# EAGLE board gate_boost_panel (EAGLE 9.3.0)
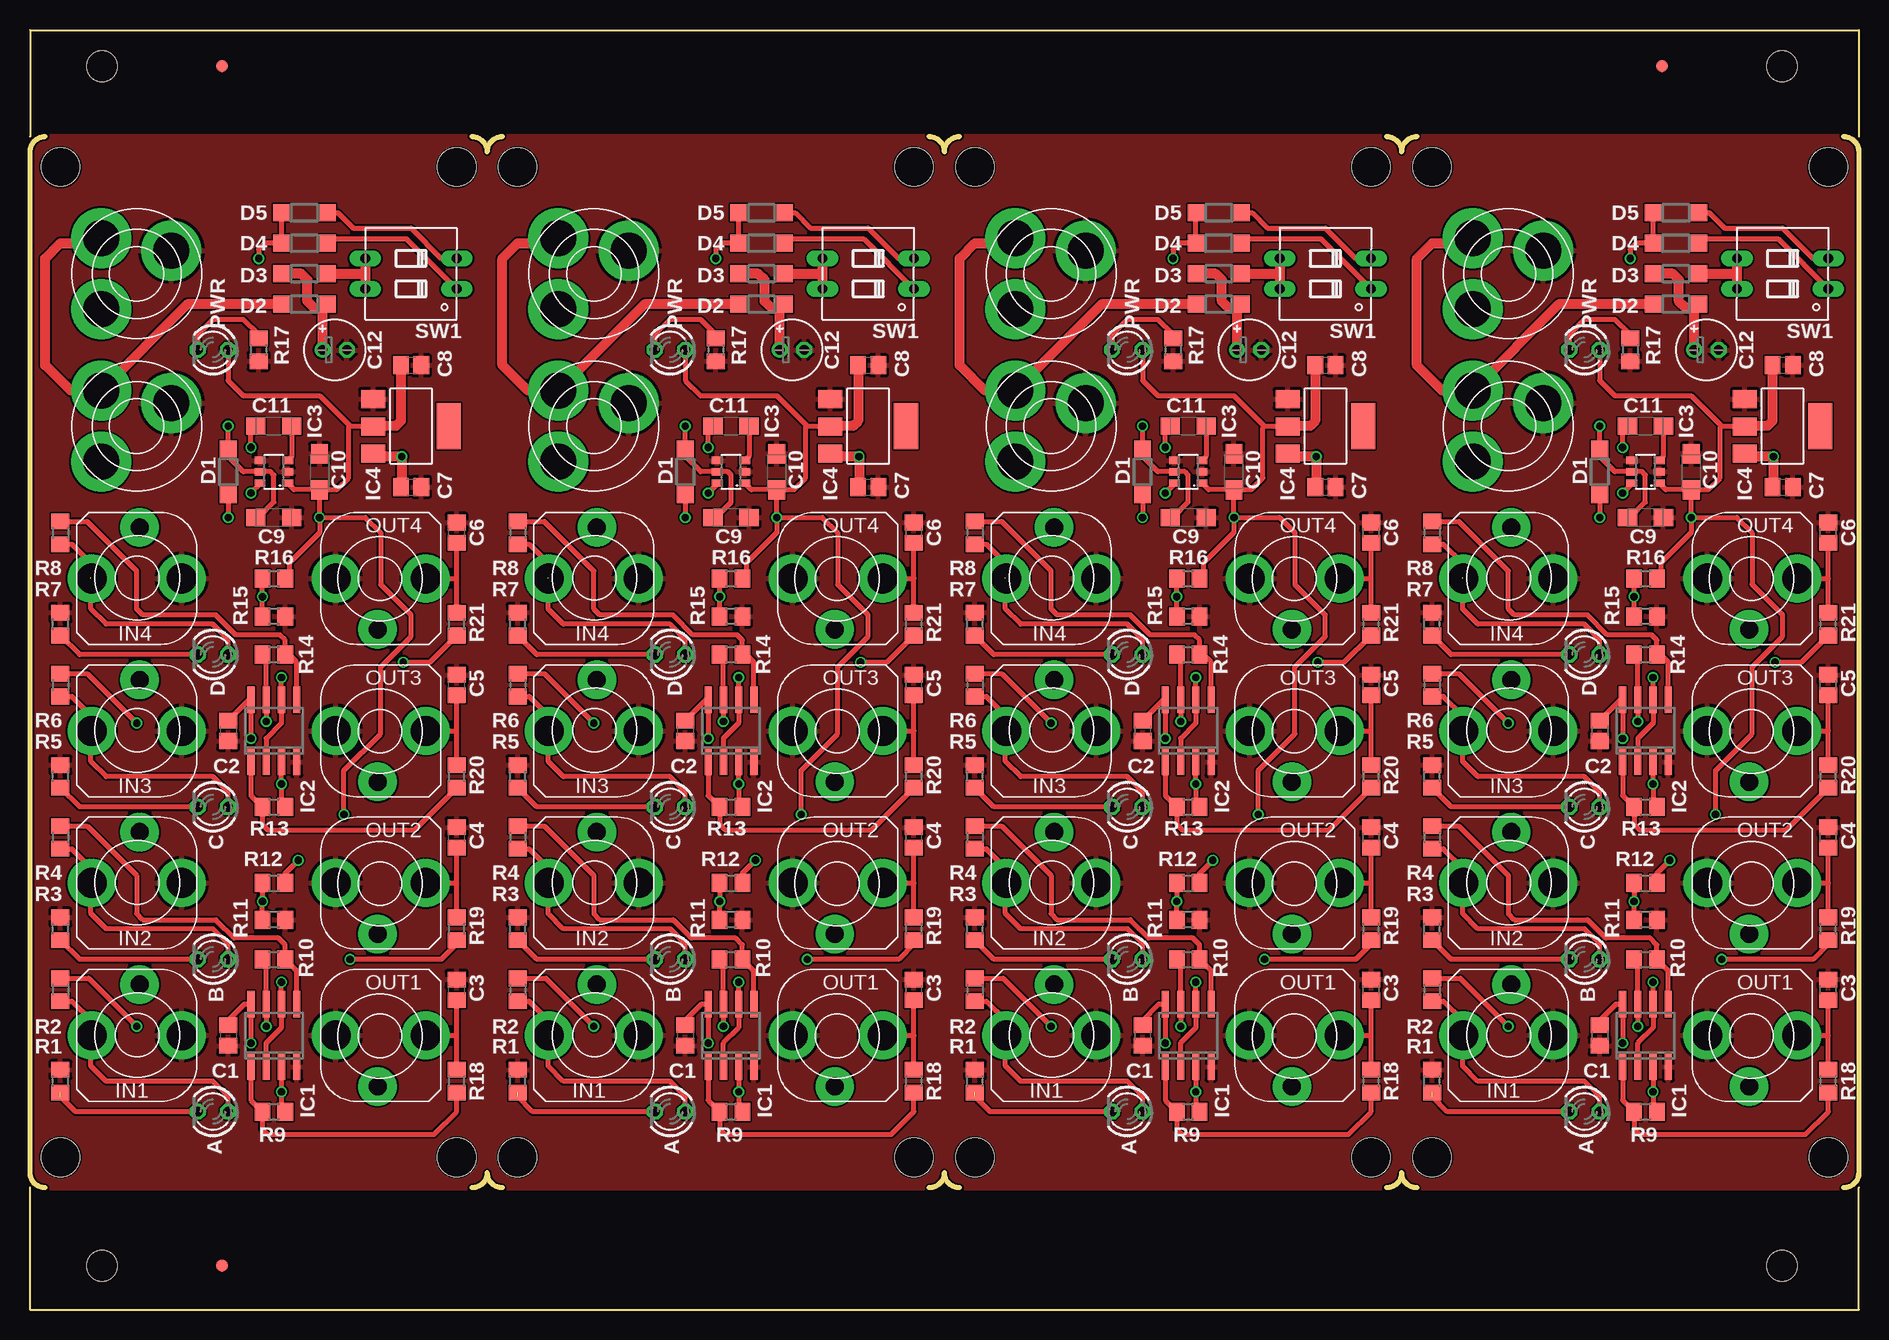
[diagram p0: board, top side]
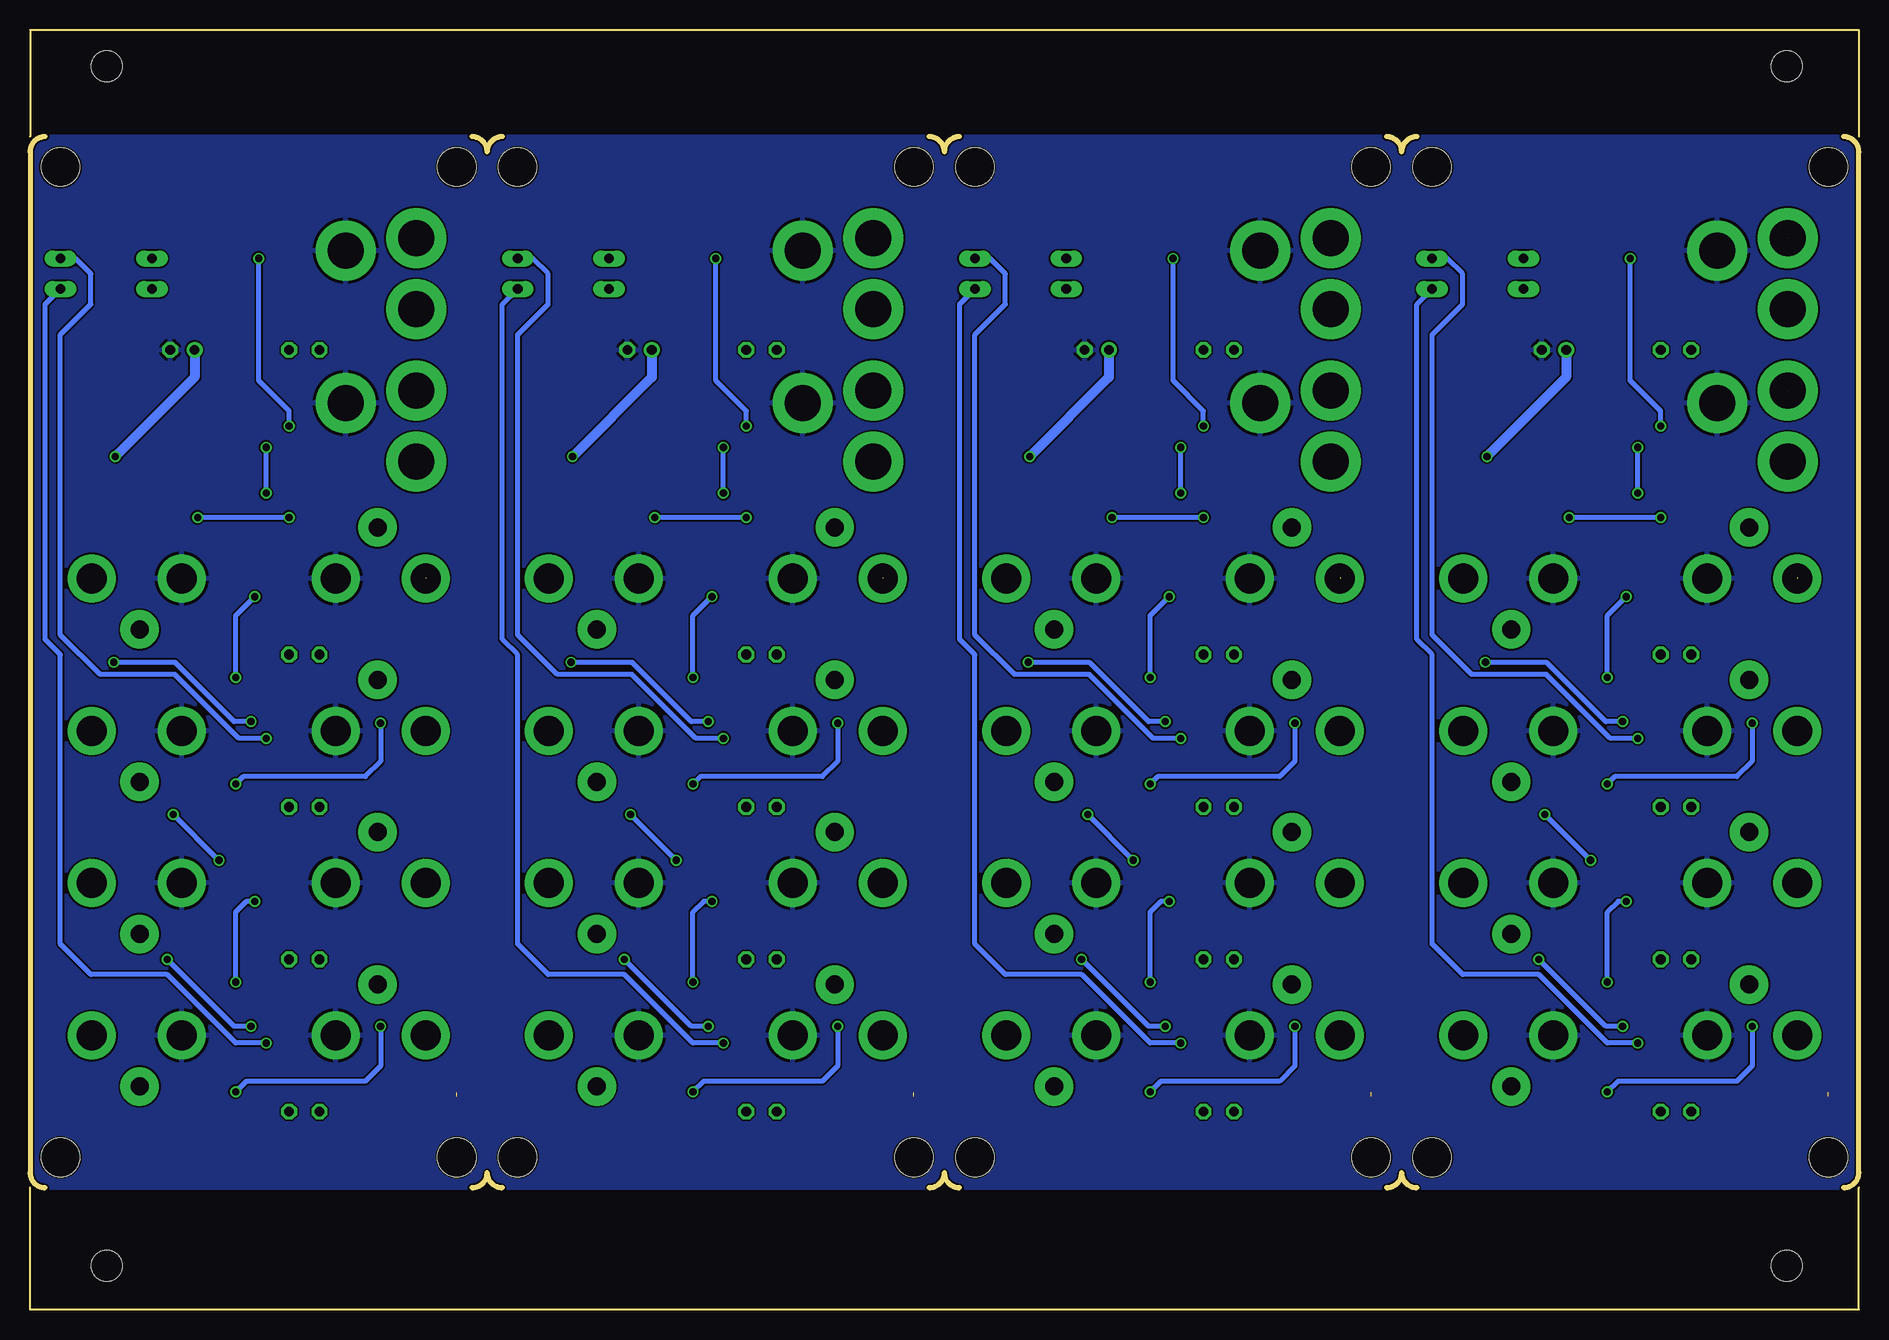
[diagram p1: board, bottom side, seen from below]

Size 152.4 x 106.68 mm. Coordinates in mm from the lower left corner, seen from the top.
Outline: 1.27,10.16 arc-90 0,11.43 0,96.52 arc-90 1.27,97.79
Outline: 36.83,97.79 arc-90 38.1,96.52 arc-90 39.37,97.79
Outline: 36.83,10.16 arc90 38.1,11.43 arc90 39.37,10.16
Outline: 74.93,97.79 arc-90 76.2,96.52 arc-90 77.47,97.79
Outline: 74.93,10.16 arc90 76.2,11.43 arc90 77.47,10.16
Outline: 113.03,97.79 arc-90 114.3,96.52 arc-90 115.57,97.79
Outline: 113.03,10.16 arc90 114.3,11.43 arc90 115.57,10.16
Outline: 151.13,97.79 arc-90 152.4,96.52 152.4,11.43 arc-90 151.13,10.16
Outline: 0,97.79 0,106.68 152.4,106.68 152.4,97.79
Outline: 0,10.16 0,0 152.4,0 152.4,10.16
Copper layers (1*16): Top 0.035mm / dielectric 1.5mm / Bottom 0.035mm
Design rules "hackvana": minimum track width 6mil, minimum drill 0.3mm, track to track 6mil, track to pad 9mil, pad to pad 6mil, via to via 6mil, smd to smd 0mil, copper to edge 6mil, drill to drill 6mil, minimum pad ring 10mil, minimum via ring 6mil, stop-mask expansion 2mil, vias tented up to drill 100mil, thermal gap 10mil
Holes 3.2 mm at 2.54,95.25 2.54,12.7 35.56,12.7 35.56,95.25 40.64,95.25 40.64,12.7 73.66,12.7 73.66,95.25 78.74,95.25 78.74,12.7 111.76,12.7 111.76,95.25 116.84,95.25 116.84,12.7 149.86,12.7 149.86,95.25
Holes 2.54 mm at 6,103.66 6,3.66 146,103.66 146,3.66

## Footprints (pad centres in the part's own frame; a part is rotated, then mirrored left to right if it is on the bottom)
LED3MM = drill 0.813 octagon: A -1.27,0; K 1.27,0
C0805 = smd 1.3 x 1.5: 1 -0.85,0; 2 0.85,0
SMC_A = smd 1.6 x 1.4: + -1.5,0; - 1.5,0
E2-5 = drill 0.813 pad 1.27: + -1.016,0 | drill 0.813 pad 1.27 octagon: - 1.016,0
SOD123 = smd 1.4 x 1.4: A 1.9,0; C -1.9,0
FIDUCIAL_1MM = smd 1 x 1: 1 0,0
SO08 = smd 0.6 x 2.2: 1 -1.905,-2.6; 2 -0.635,-2.6; 3 0.635,-2.6; 4 1.905,-2.6; 5 1.905,2.6; 6 0.635,2.6; 7 -0.635,2.6; 8 -1.905,2.6
SOT23-6 = smd 0.6 x 0.9: 1 -0.95,-1.15; 2 0,-1.15; 3 0.95,-1.15; 4 0.95,1.15; 5 0,1.15; 6 -0.95,1.15
SOT223 = smd 1.499 x 2.007: 1 -2.261,-3.15; 2 0.025,-3.15; 3 2.311,-3.15 | smd 3.81 x 2.007: 4 0,3.15
VERTICAL_3_5MM_SOCKET = drill 2.5 pad 4: 2 0,-3.75; 4 0,3.75 | drill 1.5 pad 3.2: 3 4.25,-0.25
R0805 = smd 1.3 x 1.5: 1 -0.95,0; 2 0.95,0
DIP02YL = drill 0.813 long: 1 -1.27,-3.81; 2 1.27,-3.81; 3 1.27,3.81; 4 -1.27,3.81
PWR_SOCKET_2_1MM = drill 3 pad 5: BARREL 0,4.2; NC -4.2,0; PIN 3.4,-0.7

## Placement (x,y rotation side)
A  [LED3MM]  15.24,16.51 180 top
A1  [LED3MM]  53.34,16.51 180 top
A2  [LED3MM]  91.44,16.51 180 top
A3  [LED3MM]  129.54,16.51 180 top
B  [LED3MM]  15.24,29.21 180 top
B1  [LED3MM]  53.34,29.21 180 top
B2  [LED3MM]  91.44,29.21 180 top
B3  [LED3MM]  129.54,29.21 180 top
C  [LED3MM]  15.24,41.91 180 top
C1  [C0805]  16.51,22.86 270 top
C2  [C0805]  16.51,48.26 270 top
C3  [C0805]  35.56,26.67 90 top
C4  [C0805]  35.56,39.37 90 top
C5  [C0805]  35.56,52.07 90 top
C6  [C0805]  35.56,64.77 90 top
C7  [C0805]  31.75,68.58 0 top
C8  [C0805]  31.75,78.74 0 top
C9  [SMC_A]  20.32,66.04 0 top
C10  10u  [SMC_A]  24.13,69.85 90 top
C11  10u  [SMC_A]  20.32,73.66 0 top
C12  [E2-5]  25.4,80.01 0 top
C13  [C0805]  73.66,26.67 90 top
C14  [C0805]  73.66,39.37 90 top
C15  10u  [SMC_A]  58.42,73.66 0 top
C16  [SMC_A]  58.42,66.04 0 top
C17  10u  [SMC_A]  62.23,69.85 90 top
C18  [C0805]  54.61,22.86 270 top
C19  [LED3MM]  53.34,41.91 180 top
C20  [C0805]  73.66,52.07 90 top
C21  [C0805]  73.66,64.77 90 top
C22  [C0805]  54.61,48.26 270 top
C23  [E2-5]  63.5,80.01 0 top
C24  [C0805]  69.85,68.58 0 top
C25  [C0805]  69.85,78.74 0 top
C26  [C0805]  111.76,26.67 90 top
C27  [C0805]  111.76,39.37 90 top
C28  10u  [SMC_A]  96.52,73.66 0 top
C29  [SMC_A]  96.52,66.04 0 top
C30  10u  [SMC_A]  100.33,69.85 90 top
C31  [C0805]  92.71,22.86 270 top
C32  [LED3MM]  91.44,41.91 180 top
C33  [C0805]  111.76,52.07 90 top
C34  [C0805]  111.76,64.77 90 top
C35  [C0805]  92.71,48.26 270 top
C36  [E2-5]  101.6,80.01 0 top
C37  [C0805]  107.95,68.58 0 top
C38  [C0805]  107.95,78.74 0 top
C39  [C0805]  149.86,26.67 90 top
C40  [C0805]  149.86,39.37 90 top
C41  10u  [SMC_A]  134.62,73.66 0 top
C42  [SMC_A]  134.62,66.04 0 top
C43  10u  [SMC_A]  138.43,69.85 90 top
C44  [C0805]  130.81,22.86 270 top
C45  [LED3MM]  129.54,41.91 180 top
C46  [C0805]  149.86,52.07 90 top
C47  [C0805]  149.86,64.77 90 top
C48  [C0805]  130.81,48.26 270 top
C49  [E2-5]  139.7,80.01 0 top
C50  [C0805]  146.05,68.58 0 top
C51  [C0805]  146.05,78.74 0 top
D  [LED3MM]  15.24,54.61 180 top
D1  MBR0520LT  [SOD123]  16.51,69.85 270 top
D2  MBR0520LT  [SOD123]  22.86,83.82 180 top
D3  MBR0520LT  [SOD123]  22.86,86.36 180 top
D4  MBR0520LT  [SOD123]  22.86,88.9 180 top
D5  MBR0520LT  [SOD123]  22.86,91.44 180 top
D6  MBR0520LT  [SOD123]  54.61,69.85 270 top
D7  [LED3MM]  53.34,54.61 180 top
D8  MBR0520LT  [SOD123]  60.96,83.82 180 top
D9  MBR0520LT  [SOD123]  60.96,88.9 180 top
D10  MBR0520LT  [SOD123]  60.96,91.44 180 top
D11  MBR0520LT  [SOD123]  60.96,86.36 180 top
D12  MBR0520LT  [SOD123]  92.71,69.85 270 top
D13  [LED3MM]  91.44,54.61 180 top
D14  MBR0520LT  [SOD123]  99.06,83.82 180 top
D15  MBR0520LT  [SOD123]  99.06,88.9 180 top
D16  MBR0520LT  [SOD123]  99.06,91.44 180 top
D17  MBR0520LT  [SOD123]  99.06,86.36 180 top
D18  MBR0520LT  [SOD123]  130.81,69.85 270 top
D19  [LED3MM]  129.54,54.61 180 top
D20  MBR0520LT  [SOD123]  137.16,83.82 180 top
D21  MBR0520LT  [SOD123]  137.16,88.9 180 top
D22  MBR0520LT  [SOD123]  137.16,91.44 180 top
D23  MBR0520LT  [SOD123]  137.16,86.36 180 top
E$1  [FIDUCIAL_1MM]  16,103.66 0 top
E$2  [FIDUCIAL_1MM]  16,3.66 0 top
E$3  [FIDUCIAL_1MM]  136,103.66 0 top
IC1  LM358D  [SO08]  20.32,22.86 0 top
IC2  LM358D  [SO08]  20.32,48.26 0 top
IC3  LM27675M5_CHARGEPUMP  [SOT23-6]  20.32,69.85 90 top
IC4  REG1117  [SOT223]  31.75,73.66 270 top
IC5  LM27675M5_CHARGEPUMP  [SOT23-6]  58.42,69.85 90 top
IC6  LM358D  [SO08]  58.42,22.86 0 top
IC7  LM358D  [SO08]  58.42,48.26 0 top
IC8  REG1117  [SOT223]  69.85,73.66 270 top
IC9  LM27675M5_CHARGEPUMP  [SOT23-6]  96.52,69.85 90 top
IC10  LM358D  [SO08]  96.52,22.86 0 top
IC11  LM358D  [SO08]  96.52,48.26 0 top
IC12  REG1117  [SOT223]  107.95,73.66 270 top
IC13  LM27675M5_CHARGEPUMP  [SOT23-6]  134.62,69.85 90 top
IC14  LM358D  [SO08]  134.62,22.86 0 top
IC15  LM358D  [SO08]  134.62,48.26 0 top
IC16  REG1117  [SOT223]  146.05,73.66 270 top
IN1  VERTICAL_3_5MM_SOCKET  [VERTICAL_3_5MM_SOCKET]  8.89,22.86 90 top
IN2  VERTICAL_3_5MM_SOCKET  [VERTICAL_3_5MM_SOCKET]  8.89,35.56 90 top
IN3  VERTICAL_3_5MM_SOCKET  [VERTICAL_3_5MM_SOCKET]  8.89,48.26 90 top
IN4  VERTICAL_3_5MM_SOCKET  [VERTICAL_3_5MM_SOCKET]  8.89,60.96 90 top
IN5  VERTICAL_3_5MM_SOCKET  [VERTICAL_3_5MM_SOCKET]  46.99,22.86 90 top
IN6  VERTICAL_3_5MM_SOCKET  [VERTICAL_3_5MM_SOCKET]  46.99,35.56 90 top
IN7  VERTICAL_3_5MM_SOCKET  [VERTICAL_3_5MM_SOCKET]  46.99,48.26 90 top
IN8  VERTICAL_3_5MM_SOCKET  [VERTICAL_3_5MM_SOCKET]  46.99,60.96 90 top
IN9  VERTICAL_3_5MM_SOCKET  [VERTICAL_3_5MM_SOCKET]  85.09,22.86 90 top
IN10  VERTICAL_3_5MM_SOCKET  [VERTICAL_3_5MM_SOCKET]  85.09,35.56 90 top
IN11  VERTICAL_3_5MM_SOCKET  [VERTICAL_3_5MM_SOCKET]  85.09,48.26 90 top
IN12  VERTICAL_3_5MM_SOCKET  [VERTICAL_3_5MM_SOCKET]  85.09,60.96 90 top
IN13  VERTICAL_3_5MM_SOCKET  [VERTICAL_3_5MM_SOCKET]  123.19,22.86 90 top
IN14  VERTICAL_3_5MM_SOCKET  [VERTICAL_3_5MM_SOCKET]  123.19,35.56 90 top
IN15  VERTICAL_3_5MM_SOCKET  [VERTICAL_3_5MM_SOCKET]  123.19,48.26 90 top
IN16  VERTICAL_3_5MM_SOCKET  [VERTICAL_3_5MM_SOCKET]  123.19,60.96 90 top
OUT1  VERTICAL_3_5MM_SOCKET  [VERTICAL_3_5MM_SOCKET]  29.21,22.86 270 top
OUT2  VERTICAL_3_5MM_SOCKET  [VERTICAL_3_5MM_SOCKET]  29.21,35.56 270 top
OUT3  VERTICAL_3_5MM_SOCKET  [VERTICAL_3_5MM_SOCKET]  29.21,48.26 270 top
OUT4  VERTICAL_3_5MM_SOCKET  [VERTICAL_3_5MM_SOCKET]  29.21,60.96 270 top
OUT5  VERTICAL_3_5MM_SOCKET  [VERTICAL_3_5MM_SOCKET]  67.31,22.86 270 top
OUT6  VERTICAL_3_5MM_SOCKET  [VERTICAL_3_5MM_SOCKET]  67.31,35.56 270 top
OUT7  VERTICAL_3_5MM_SOCKET  [VERTICAL_3_5MM_SOCKET]  67.31,48.26 270 top
OUT8  VERTICAL_3_5MM_SOCKET  [VERTICAL_3_5MM_SOCKET]  67.31,60.96 270 top
OUT9  VERTICAL_3_5MM_SOCKET  [VERTICAL_3_5MM_SOCKET]  105.41,22.86 270 top
OUT10  VERTICAL_3_5MM_SOCKET  [VERTICAL_3_5MM_SOCKET]  105.41,35.56 270 top
OUT11  VERTICAL_3_5MM_SOCKET  [VERTICAL_3_5MM_SOCKET]  105.41,48.26 270 top
OUT12  VERTICAL_3_5MM_SOCKET  [VERTICAL_3_5MM_SOCKET]  105.41,60.96 270 top
OUT13  VERTICAL_3_5MM_SOCKET  [VERTICAL_3_5MM_SOCKET]  143.51,22.86 270 top
OUT14  VERTICAL_3_5MM_SOCKET  [VERTICAL_3_5MM_SOCKET]  143.51,35.56 270 top
OUT15  VERTICAL_3_5MM_SOCKET  [VERTICAL_3_5MM_SOCKET]  143.51,48.26 270 top
OUT16  VERTICAL_3_5MM_SOCKET  [VERTICAL_3_5MM_SOCKET]  143.51,60.96 270 top
PWR  [LED3MM]  15.24,80.01 180 top
PWR1  [LED3MM]  53.34,80.01 180 top
PWR2  [LED3MM]  91.44,80.01 180 top
PWR3  [LED3MM]  129.54,80.01 180 top
R1  1K  [R0805]  2.54,19.05 90 top
R2  100k  [R0805]  2.54,26.67 270 top
R3  1K  [R0805]  2.54,31.75 90 top
R4  100k  [R0805]  2.54,39.37 270 top
R5  1K  [R0805]  2.54,44.45 90 top
R6  100k  [R0805]  2.54,52.07 270 top
R7  1K  [R0805]  2.54,57.15 90 top
R8  100k  [R0805]  2.54,64.77 270 top
R9  2m2  [R0805]  20.32,16.51 0 top
R10  2m2  [R0805]  20.32,29.21 0 top
R11  47k  [R0805]  20.32,32.51 180 top
R12  47k  [R0805]  20.32,35.56 0 top
R13  2m2  [R0805]  20.32,41.91 0 top
R14  2m2  [R0805]  20.32,54.61 0 top
R15  47k  [R0805]  20.32,57.78 180 top
R16  47k  [R0805]  20.32,60.96 0 top
R17  1K  [R0805]  19.05,80.01 270 top
R18  1k  [R0805]  35.56,19.05 90 top
R19  1k  [R0805]  35.56,31.75 90 top
R20  1k  [R0805]  35.56,44.45 90 top
R21  1k  [R0805]  35.56,57.15 90 top
R22  1K  [R0805]  40.64,31.75 90 top
R23  1K  [R0805]  40.64,19.05 90 top
R24  1k  [R0805]  73.66,19.05 90 top
R25  1k  [R0805]  73.66,31.75 90 top
R26  47k  [R0805]  58.42,32.51 180 top
R27  47k  [R0805]  58.42,35.56 0 top
R28  100k  [R0805]  40.64,26.67 270 top
R29  100k  [R0805]  40.64,39.37 270 top
R30  2m2  [R0805]  58.42,29.21 0 top
R31  2m2  [R0805]  58.42,16.51 0 top
R32  1K  [R0805]  40.64,57.15 90 top
R33  1K  [R0805]  40.64,44.45 90 top
R34  1k  [R0805]  73.66,44.45 90 top
R35  1k  [R0805]  73.66,57.15 90 top
R36  47k  [R0805]  58.42,57.78 180 top
R37  47k  [R0805]  58.42,60.96 0 top
R38  100k  [R0805]  40.64,52.07 270 top
R39  100k  [R0805]  40.64,64.77 270 top
R40  2m2  [R0805]  58.42,54.61 0 top
R41  2m2  [R0805]  58.42,41.91 0 top
R42  1K  [R0805]  57.15,80.01 270 top
R43  1K  [R0805]  78.74,31.75 90 top
R44  1K  [R0805]  78.74,19.05 90 top
R45  1k  [R0805]  111.76,19.05 90 top
R46  1k  [R0805]  111.76,31.75 90 top
R47  47k  [R0805]  96.52,32.51 180 top
R48  47k  [R0805]  96.52,35.56 0 top
R49  100k  [R0805]  78.74,26.67 270 top
R50  100k  [R0805]  78.74,39.37 270 top
R51  2m2  [R0805]  96.52,29.21 0 top
R52  2m2  [R0805]  96.52,16.51 0 top
R53  1K  [R0805]  78.74,57.15 90 top
R54  1K  [R0805]  78.74,44.45 90 top
R55  1k  [R0805]  111.76,44.45 90 top
R56  1k  [R0805]  111.76,57.15 90 top
R57  47k  [R0805]  96.52,57.78 180 top
R58  47k  [R0805]  96.52,60.96 0 top
R59  100k  [R0805]  78.74,52.07 270 top
R60  100k  [R0805]  78.74,64.77 270 top
R61  2m2  [R0805]  96.52,54.61 0 top
R62  2m2  [R0805]  96.52,41.91 0 top
R63  1K  [R0805]  95.25,80.01 270 top
R64  1K  [R0805]  116.84,31.75 90 top
R65  1K  [R0805]  116.84,19.05 90 top
R66  1k  [R0805]  149.86,19.05 90 top
R67  1k  [R0805]  149.86,31.75 90 top
R68  47k  [R0805]  134.62,32.51 180 top
R69  47k  [R0805]  134.62,35.56 0 top
R70  100k  [R0805]  116.84,26.67 270 top
R71  100k  [R0805]  116.84,39.37 270 top
R72  2m2  [R0805]  134.62,29.21 0 top
R73  2m2  [R0805]  134.62,16.51 0 top
R74  1K  [R0805]  116.84,57.15 90 top
R75  1K  [R0805]  116.84,44.45 90 top
R76  1k  [R0805]  149.86,44.45 90 top
R77  1k  [R0805]  149.86,57.15 90 top
R78  47k  [R0805]  134.62,57.78 180 top
R79  47k  [R0805]  134.62,60.96 0 top
R80  100k  [R0805]  116.84,52.07 270 top
R81  100k  [R0805]  116.84,64.77 270 top
R82  2m2  [R0805]  134.62,54.61 0 top
R83  2m2  [R0805]  134.62,41.91 0 top
R84  1K  [R0805]  133.35,80.01 270 top
SW1  [DIP02YL]  31.75,86.36 90 top
SW2  [DIP02YL]  69.85,86.36 90 top
SW3  [DIP02YL]  107.95,86.36 90 top
SW4  [DIP02YL]  146.05,86.36 90 top
U$1  PWR_SOCKET_2_1MM  [PWR_SOCKET_2_1MM]  8.89,73.66 45 top
U$2  PWR_SOCKET_2_1MM  [PWR_SOCKET_2_1MM]  8.89,86.36 45 top
U$3  PWR_SOCKET_2_1MM  [PWR_SOCKET_2_1MM]  46.99,73.66 45 top
U$4  PWR_SOCKET_2_1MM  [PWR_SOCKET_2_1MM]  46.99,86.36 45 top
U$5  PWR_SOCKET_2_1MM  [PWR_SOCKET_2_1MM]  85.09,73.66 45 top
U$6  PWR_SOCKET_2_1MM  [PWR_SOCKET_2_1MM]  85.09,86.36 45 top
U$7  PWR_SOCKET_2_1MM  [PWR_SOCKET_2_1MM]  123.19,73.66 45 top
U$8  PWR_SOCKET_2_1MM  [PWR_SOCKET_2_1MM]  123.19,86.36 45 top

## Library data of the parts
A A1-A3 B B1-B3 C C19 C32 C45 D D7 D13 D19 PWR PWR1-PWR3 = led
C1-C8 C13 C14 C18 C20-C22 C24-C27 C31 C33-C35 C37-C40 C44 C46-C48 C50 C51 = resistor
C9-C12 C15-C17 C23 C28-C30 C36 C41-C43 C49 R1-R84 = rcl
D1-D6 D8-D12 D14-D18 D20-D23 = diode
E$1-E$3 = adafruit
IC1 IC2 IC6 IC7 IC10 IC11 IC14 IC15 = linear
IC3 IC5 IC9 IC13 IN1-IN16 OUT1-OUT16 U$1-U$8 = jason_eagle6
IC4 IC8 IC12 IC16 = burr-brown; MPN: REG1117; OC_FARNELL: 1097566; OC_NEWARK: 14P6981
SW1-SW4 = switch-dil; OC_FARNELL: unknown; OC_NEWARK: unknown

## Nets
+5V: C8.1 C10.+ D1.A IC3.1 IC4.2 PWR.A R12.2 R16.2
+5V1: C17.+ C25.1 D6.A IC5.1 IC8.2 PWR1.A R27.2 R37.2
+5V2: C30.+ C38.1 D12.A IC9.1 IC12.2 PWR2.A R48.2 R58.2
+5V3: C43.+ C51.1 D18.A IC13.1 IC16.2 PWR3.A R69.2 R79.2
+10V: C9.+ D1.C D4.A D5.A IC3.5
+10V1: C16.+ D6.C D9.A D10.A IC5.5
+10V2: C29.+ D12.C D15.A D16.A IC9.5
+10V3: C42.+ D18.C D21.A D22.A IC13.5
GND: C1.2 C2.2 C3.2 C4.2 C5.2 C6.2 C7.2 C8.2 C9.- C10.- C12.- IC1.4 IC2.4 IC3.2 IC3.4 IC4.1 IN1.2 IN2.2 IN3.2 IN4.2 OUT1.2 OUT2.2 OUT3.2 OUT4.2 R1.2 R3.2 R5.2 R7.2 R11.1 R15.1 R17.2 U$1.PIN U$2.PIN
GND1: C13.2 C14.2 C16.- C17.- C18.2 C20.2 C21.2 C22.2 C23.- C24.2 C25.2 IC5.2 IC5.4 IC6.4 IC7.4 IC8.1 IN5.2 IN6.2 IN7.2 IN8.2 OUT5.2 OUT6.2 OUT7.2 OUT8.2 R22.2 R23.2 R26.1 R32.2 R33.2 R36.1 R42.2 U$3.PIN U$4.PIN
GND2: C26.2 C27.2 C29.- C30.- C31.2 C33.2 C34.2 C35.2 C36.- C37.2 C38.2 IC9.2 IC9.4 IC10.4 IC11.4 IC12.1 IN9.2 IN10.2 IN11.2 IN12.2 OUT9.2 OUT10.2 OUT11.2 OUT12.2 R43.2 R44.2 R47.1 R53.2 R54.2 R57.1 R63.2 U$5.PIN U$6.PIN
GND3: C39.2 C40.2 C42.- C43.- C44.2 C46.2 C47.2 C48.2 C49.- C50.2 C51.2 IC13.2 IC13.4 IC14.4 IC15.4 IC16.1 IN13.2 IN14.2 IN15.2 IN16.2 OUT13.2 OUT14.2 OUT15.2 OUT16.2 R64.2 R65.2 R68.1 R74.2 R75.2 R78.1 R84.2 U$7.PIN U$8.PIN
IN1: A.A IN1.4 R2.2
IN2: B.A IN2.4 R4.2
IN3: C.A IN3.4 R6.2
IN4: D.A IN4.4 R8.2
IN5: C19.A IN7.4 R38.2
IN6: D7.A IN8.4 R39.2
IN7: A1.A IN5.4 R28.2
IN8: B1.A IN6.4 R29.2
IN9: C32.A IN11.4 R59.2
IN10: D13.A IN12.4 R60.2
IN11: A2.A IN9.4 R49.2
IN12: B2.A IN10.4 R50.2
IN13: C45.A IN15.4 R80.2
IN14: D19.A IN16.4 R81.2
IN15: A3.A IN13.4 R70.2
IN16: B3.A IN14.4 R71.2
N$1: IC1.2 IC1.6 R11.2 R12.1
N$2: A.K R1.1
N$3: B.K R3.1
N$4: IC1.3 R2.1 R9.2
N$5: IC1.5 R4.1 R10.2
N$6: D3.C SW1.3 SW1.4
N$7: C5.1 OUT3.4 R20.2
N$8: C6.1 OUT4.4 R21.2
N$9: IC1.1 R9.1 R18.1
N$10: IC2.7 R14.1 R21.1
N$11: IC2.1 R13.1 R20.1
N$12: IC1.7 R10.1 R19.1
N$13: IC2.2 IC2.6 R15.2 R16.1
N$14: C.K R5.1
N$15: D.K R7.1
N$16: IC2.3 R6.1 R13.2
N$17: IC2.5 R8.1 R14.2
N$18: C13.1 OUT5.4 R24.2
N$19: C3.1 OUT1.4 R18.2
N$20: C4.1 OUT2.4 R19.2
N$21: D2.A U$1.BARREL U$2.BARREL
N$22: C14.1 OUT6.4 R25.2
N$23: PWR.K R17.1
N$24: IC6.7 R25.1 R30.1
N$25: IC6.1 R24.1 R31.1
N$26: C15.+ IC5.6
N$27: C15.- IC5.3
N$28: IC6.2 IC6.6 R26.2 R27.1
N$29: A1.K R23.1
N$30: B1.K R22.1
N$31: IC6.3 R28.1 R31.2
N$32: IC6.5 R29.1 R30.2
N$33: C20.1 OUT7.4 R34.2
N$34: C21.1 OUT8.4 R35.2
N$35: IC7.7 R35.1 R40.1
N$36: IC7.1 R34.1 R41.1
N$37: IC7.2 IC7.6 R36.2 R37.1
N$38: C11.+ IC3.6
N$39: C11.- IC3.3
N$40: C19.K R33.1
N$41: D7.K R32.1
N$42: IC7.3 R38.1 R41.2
N$43: IC7.5 R39.1 R40.2
N$44: D8.A U$3.BARREL U$4.BARREL
N$45: PWR1.K R42.1
N$46: D11.C SW2.3 SW2.4
N$47: C26.1 OUT9.4 R45.2
N$48: C27.1 OUT10.4 R46.2
N$49: IC10.7 R46.1 R51.1
N$50: IC10.1 R45.1 R52.1
N$51: C28.+ IC9.6
N$52: C28.- IC9.3
N$53: IC10.2 IC10.6 R47.2 R48.1
N$54: A2.K R44.1
N$55: B2.K R43.1
N$56: IC10.3 R49.1 R52.2
N$57: IC10.5 R50.1 R51.2
N$58: C33.1 OUT11.4 R55.2
N$59: C34.1 OUT12.4 R56.2
N$60: IC11.7 R56.1 R61.1
N$61: IC11.1 R55.1 R62.1
N$62: IC11.2 IC11.6 R57.2 R58.1
N$63: C32.K R54.1
N$64: D13.K R53.1
N$65: IC11.3 R59.1 R62.2
N$66: IC11.5 R60.1 R61.2
N$67: D14.A U$5.BARREL U$6.BARREL
N$68: PWR2.K R63.1
N$69: D17.C SW3.3 SW3.4
N$70: C39.1 OUT13.4 R66.2
N$71: C40.1 OUT14.4 R67.2
N$72: IC14.7 R67.1 R72.1
N$73: IC14.1 R66.1 R73.1
N$74: C41.+ IC13.6
N$75: C41.- IC13.3
N$76: IC14.2 IC14.6 R68.2 R69.1
N$77: A3.K R65.1
N$78: B3.K R64.1
N$79: IC14.3 R70.1 R73.2
N$80: IC14.5 R71.1 R72.2
N$81: C46.1 OUT15.4 R76.2
N$82: C47.1 OUT16.4 R77.2
N$83: IC15.7 R77.1 R82.1
N$84: IC15.1 R76.1 R83.1
N$85: IC15.2 IC15.6 R78.2 R79.1
N$86: C45.K R75.1
N$87: D19.K R74.1
N$88: IC15.3 R80.1 R83.2
N$89: IC15.5 R81.1 R82.2
N$90: D20.A U$7.BARREL U$8.BARREL
N$91: PWR3.K R84.1
N$92: D23.C SW4.3 SW4.4
VGATE1: C1.1 D4.C IC1.8 SW1.1
VGATE2: C2.1 D5.C IC2.8 SW1.2
VGATE3: C22.1 D10.C IC7.8 SW2.2
VGATE4: C18.1 D9.C IC6.8 SW2.1
VGATE5: C35.1 D16.C IC11.8 SW3.2
VGATE6: C31.1 D15.C IC10.8 SW3.1
VGATE7: C48.1 D22.C IC15.8 SW4.2
VGATE8: C44.1 D21.C IC14.8 SW4.1
VIN: C7.1 C12.+ D2.C D3.A IC4.3
VIN1: C23.+ C24.1 D8.C D11.A IC8.3
VIN2: C36.+ C37.1 D14.C D17.A IC12.3
VIN3: C49.+ C50.1 D20.C D23.A IC16.3

## Tracks (layer width: path | path; a pad name or v marks a point on that pad's centre or on a via)
+5V  (via drill 0.6)
  Top 0.406: R12.2 21.27,36.38 v22.35,37.47 | v26.16,41.27 26.16,44.96 29.21,48.01 29.21,53.59 31.75,56.13 31.75,57.91 29.21,60.45 29.21,64.77 27.94,66.04 v24.13,66.04 | C10.+ 22.02,68.35 IC3.1 | D1.A v16.51,66.04 | v24.13,66.04 C10.+ | PWR.A 16.51,77.47 17.78,76.2 24.13,76.2 26.67,73.66 | 26.67,73.66 28.57,73.66 IC4.2 | C10.+ 25.55,68.35 26.54,69.34 26.54,73.53 26.67,73.66 | v24.13,66.04 24.13,64.77 21.59,62.23 21.59,61.28 R16.2
  Top 0.813: C8.1 30.9,74.08 30.48,73.66 28.63,73.66 IC4.2
  Bottom 0.406: v22.35,37.47 v26.16,41.27 | v16.51,66.04 v24.13,66.04
+5V1  (via drill 0.6)
  Top 0.406: R27.2 59.37,36.38 v60.45,37.47 | v64.26,41.27 64.26,44.96 67.31,48.01 67.31,53.59 69.85,56.13 69.85,57.91 67.31,60.45 67.31,64.77 66.04,66.04 v62.23,66.04 | C17.+ 60.12,68.35 IC5.1 | D6.A v54.61,66.04 | v62.23,66.04 C17.+ | PWR1.A 54.61,77.47 55.88,76.2 62.23,76.2 64.77,73.66 | 64.77,73.66 66.67,73.66 IC8.2 | C17.+ 63.65,68.35 64.64,69.34 64.64,73.53 64.77,73.66 | v62.23,66.04 62.23,64.77 59.69,62.23 59.69,61.28 R37.2
  Top 0.813: C25.1 69,74.08 68.58,73.66 66.73,73.66 IC8.2
  Bottom 0.406: v60.45,37.47 v64.26,41.27 | v54.61,66.04 v62.23,66.04
+5V2  (via drill 0.6)
  Top 0.406: R48.2 97.47,36.38 v98.55,37.47 | v102.36,41.27 102.36,44.96 105.41,48.01 105.41,53.59 107.95,56.13 107.95,57.91 105.41,60.45 105.41,64.77 104.14,66.04 v100.33,66.04 | C30.+ 98.22,68.35 IC9.1 | D12.A v92.71,66.04 | v100.33,66.04 C30.+ | PWR2.A 92.71,77.47 93.98,76.2 100.33,76.2 102.87,73.66 | 102.87,73.66 104.78,73.66 IC12.2 | C30.+ 101.75,68.35 102.74,69.34 102.74,73.53 102.87,73.66 | v100.33,66.04 100.33,64.77 97.79,62.23 97.79,61.28 R58.2
  Top 0.813: C38.1 107.1,74.08 106.68,73.66 104.83,73.66 IC12.2
  Bottom 0.406: v98.55,37.47 v102.36,41.27 | v92.71,66.04 v100.33,66.04
+5V3  (via drill 0.6)
  Top 0.406: R69.2 135.57,36.38 v136.65,37.47 | v140.46,41.27 140.46,44.96 143.51,48.01 143.51,53.59 146.05,56.13 146.05,57.91 143.51,60.45 143.51,64.77 142.24,66.04 v138.43,66.04 | C43.+ 136.32,68.35 IC13.1 | D18.A v130.81,66.04 | v138.43,66.04 C43.+ | PWR3.A 130.81,77.47 132.08,76.2 138.43,76.2 140.97,73.66 | 140.97,73.66 142.88,73.66 IC16.2 | C43.+ 139.85,68.35 140.84,69.34 140.84,73.53 140.97,73.66 | v138.43,66.04 138.43,64.77 135.89,62.23 135.89,61.28 R79.2
  Top 0.813: C51.1 145.2,74.08 144.78,73.66 142.93,73.66 IC16.2
  Bottom 0.406: v136.65,37.47 v140.46,41.27 | v130.81,66.04 v138.43,66.04
+10V  (via drill 0.6)
  Top 0.406: C9.+ 19.05,66.04 20.32,67.31 20.32,69.6 20.07,69.85 IC3.5 17.78,69.85 16.51,71.12 D1.C v16.51,73.66 | D5.A D4.A 19.56,88.9 19.05,88.39 v19.05,87.63
  Bottom 0.406: v16.51,73.66 16.51,74.93 19.05,77.47 v19.05,87.63
+10V1  (via drill 0.6)
  Top 0.406: C16.+ 57.15,66.04 58.42,67.31 58.42,69.6 58.17,69.85 IC5.5 55.88,69.85 54.61,71.12 D6.C v54.61,73.66 | D10.A D9.A 57.66,88.9 57.15,88.39 v57.15,87.63
  Bottom 0.406: v54.61,73.66 54.61,74.93 57.15,77.47 v57.15,87.63
+10V2  (via drill 0.6)
  Top 0.406: C29.+ 95.25,66.04 96.52,67.31 96.52,69.6 96.27,69.85 IC9.5 93.98,69.85 92.71,71.12 D12.C v92.71,73.66 | D16.A D15.A 95.76,88.9 95.25,88.39 v95.25,87.63
  Bottom 0.406: v92.71,73.66 92.71,74.93 95.25,77.47 v95.25,87.63
+10V3  (via drill 0.6)
  Top 0.406: C42.+ 133.35,66.04 134.62,67.31 134.62,69.6 134.37,69.85 IC13.5 132.08,69.85 130.81,71.12 D18.C v130.81,73.66 | D22.A D21.A 133.86,88.9 133.35,88.39 v133.35,87.63
  Bottom 0.406: v130.81,73.66 130.81,74.93 133.35,77.47 v133.35,87.63
GND
  pour Top: 0.25,10.16 38.1,10.16 38.1,97.79 0.25,97.79
  pour Bottom: 0,10.16 38.1,10.16 38.1,97.79 0,97.79
GND1
  pour Top: 38.35,10.16 76.2,10.16 76.2,97.79 38.35,97.79
  pour Bottom: 38.1,10.16 76.2,10.16 76.2,97.79 38.1,97.79
GND2
  pour Top: 76.45,10.16 114.3,10.16 114.3,97.79 76.45,97.79
  pour Bottom: 76.2,10.16 114.3,10.16 114.3,97.79 76.2,97.79
GND3
  pour Top: 114.55,10.16 152.4,10.16 152.4,97.79 114.55,97.79
  pour Bottom: 114.3,10.16 152.4,10.16 152.4,97.79 114.3,97.79
IN1
  Top 0.406: A.A 16.51,17.78 15.24,19.05 6.35,19.05 5.08,20.32 5.08,22.8 IN1.4 5.14,24.07 3.49,25.72 R2.2
IN2
  Top 0.406: B.A 16.51,30.48 15.24,31.75 6.35,31.75 5.08,33.02 5.08,35.5 IN2.4 5.08,35.62 5.08,36.83 3.49,38.42 R4.2
IN3
  Top 0.406: C.A 16.51,43.18 15.24,44.45 6.35,44.45 5.08,45.72 5.08,48.2 IN3.4 5.08,48.32 5.08,49.53 3.49,51.12 R6.2
IN4  (1 unrouted)
  Top 0.406: D.A 16.51,55.88 15.24,57.15 6.35,57.15 5.08,58.42 5.08,60.96 | R8.2 3.49,63.82 5.08,62.23 5.08,61.02 IN4.4
IN5
  Top 0.406: C19.A 54.61,43.18 53.34,44.45 44.45,44.45 43.18,45.72 43.18,48.2 IN7.4 43.18,48.32 43.18,49.53 41.59,51.12 R38.2
IN6  (1 unrouted)
  Top 0.406: D7.A 54.61,55.88 53.34,57.15 44.45,57.15 43.18,58.42 43.18,60.96 | R39.2 41.59,63.82 43.18,62.23 43.18,61.02 IN8.4
IN7
  Top 0.406: A1.A 54.61,17.78 53.34,19.05 44.45,19.05 43.18,20.32 43.18,22.8 IN5.4 43.24,24.07 41.59,25.72 R28.2
IN8
  Top 0.406: B1.A 54.61,30.48 53.34,31.75 44.45,31.75 43.18,33.02 43.18,35.5 IN6.4 43.18,35.62 43.18,36.83 41.59,38.42 R29.2
IN9
  Top 0.406: C32.A 92.71,43.18 91.44,44.45 82.55,44.45 81.28,45.72 81.28,48.2 IN11.4 81.28,48.32 81.28,49.53 79.69,51.12 R59.2
IN10  (1 unrouted)
  Top 0.406: D13.A 92.71,55.88 91.44,57.15 82.55,57.15 81.28,58.42 81.28,60.96 | R60.2 79.69,63.82 81.28,62.23 81.28,61.02 IN12.4
IN11
  Top 0.406: A2.A 92.71,17.78 91.44,19.05 82.55,19.05 81.28,20.32 81.28,22.8 IN9.4 81.34,24.07 79.69,25.72 R49.2
IN12
  Top 0.406: B2.A 92.71,30.48 91.44,31.75 82.55,31.75 81.28,33.02 81.28,35.5 IN10.4 81.28,35.62 81.28,36.83 79.69,38.42 R50.2
IN13
  Top 0.406: C45.A 130.81,43.18 129.54,44.45 120.65,44.45 119.38,45.72 119.38,48.2 IN15.4 119.38,48.32 119.38,49.53 117.79,51.12 R80.2
IN14  (1 unrouted)
  Top 0.406: D19.A 130.81,55.88 129.54,57.15 120.65,57.15 119.38,58.42 119.38,60.96 | R81.2 117.79,63.82 119.38,62.23 119.38,61.02 IN16.4
IN15
  Top 0.406: A3.A 130.81,17.78 129.54,19.05 120.65,19.05 119.38,20.32 119.38,22.8 IN13.4 119.44,24.07 117.79,25.72 R70.2
IN16
  Top 0.406: B3.A 130.81,30.48 129.54,31.75 120.65,31.75 119.38,33.02 119.38,35.5 IN14.4 119.38,35.62 119.38,36.83 117.79,38.42 R71.2
N$1  (via drill 0.6)
  Top 0.406: IC1.2 19.68,22.23 20.95,23.5 IC1.6 v20.95,27.3 | R11.2 v19.37,34.04 R12.1
  Bottom 0.406: v19.37,34.04 20.07,34.04 20.95,33.15 v20.95,27.3
N$2  (1 unrouted)
  Top 0.406: A.K 3.81,16.51 2.54,17.78
N$3
  Top 0.406: B.K 4.13,29.21 R3.1
N$4  (via drill 0.6)
  Top 0.406: IC1.3 v20.95,18.16 20.95,16.82 R9.2 | R2.1 4.89,27.62 v8.89,23.62
  Bottom 0.406: v8.89,23.62 8.89,20.32 10.16,19.05 20.07,19.05 v20.95,18.16
N$5
  Top 0.406: IC1.5 22.23,28.25 R10.2 21.27,30.42 20.7,30.99 17.02,30.99 15.49,32.51 9.4,32.51 8.89,33.02 8.89,36.2 4.76,40.32 R4.1
N$6
  Top 0.813: SW1.3 27.94,86.36 | 27.94,86.36 SW1.4 | D3.C 27.94,86.36
N$7
  Top 0.406: R20.2 35.56,48.26 | 35.56,48.26 C5.1 | OUT3.4 35.56,48.26
N$8
  Top 0.406: R21.2 35.56,60.96 | 35.56,60.96 C6.1 | OUT4.4 35.56,60.96
N$9
  Top 0.406: IC1.1 18.41,17.46 R9.1 19.37,15.05 19.81,14.61 33.66,14.61 35.56,16.51 R18.1
N$10  (via drill 0.6)
  Top 0.406: R14.1 19.68,54.3 IC2.7 v19.68,49.02 | v31.11,53.97 33.34,53.97 R21.1
  Bottom 0.406: v19.68,49.02 21.08,49.02 26.04,53.97 v31.11,53.97
N$11
  Top 0.406: IC2.1 18.41,42.86 R13.1 19.37,40.45 19.81,40 32.06,40 R20.1
N$12  (via drill 0.6)
  Top 0.406: R10.1 19.68,28.89 IC1.7 v19.68,23.62 | R19.1 35.56,30.48 34.29,29.21 v26.67,29.21
  Bottom 0.406: v19.68,23.62 21.08,23.62 v26.67,29.21
N$13  (via drill 0.6)
  Top 0.406: R15.2 v19.37,59.44 R16.1 | v20.95,52.7 IC2.6 20.95,48.89 19.68,47.62 IC2.2
  Bottom 0.406: v20.95,52.7 20.95,57.85 v19.37,59.44
N$14
  Top 0.406: C.K 4.13,41.91 R5.1
N$15
  Top 0.406: D.K 4.13,54.61 R7.1
N$16  (via drill 0.6)
  Top 0.406: R6.1 4.76,53.02 v8.89,48.89 | IC2.3 v20.95,43.81 20.95,42.22 R13.2
  Bottom 0.406: v8.89,48.89 8.89,45.72 10.16,44.45 20.32,44.45 v20.95,43.81
N$17
  Top 0.406: IC2.5 22.23,53.97 21.59,54.61 R14.2 21.27,55.82 20.83,56.26 17.14,56.26 15.49,57.91 9.4,57.91 8.89,58.42 8.89,61.59 4.76,65.72 R8.1
N$18
  Top 0.406: R24.2 73.66,22.86 | 73.66,22.86 C13.1 | OUT5.4 73.66,22.86
N$19
  Top 0.406: R18.2 35.56,22.86 | 35.56,22.86 C3.1 | OUT1.4 35.56,22.86
N$20
  Top 0.406: R19.2 35.56,35.56 | 35.56,35.56 C4.1 | OUT2.4 35.56,35.56
N$21  (2 unrouted)
  Top 0.813: U$2.BARREL 5.49,88.9 2.54,88.9 1.27,87.63 1.27,78.74 3.38,76.63 U$1.BARREL 13.11,83.82 D2.A
N$22
  Top 0.406: R25.2 73.66,35.56 | 73.66,35.56 C14.1 | OUT6.4 73.66,35.56
N$23
  Top 0.406: R17.1 19.05,81.28 17.78,82.55 15.24,82.55 13.97,81.28 PWR.K
N$24  (via drill 0.6)
  Top 0.406: R30.1 57.78,28.89 IC6.7 v57.78,23.62 | R25.1 73.66,30.48 72.39,29.21 v64.77,29.21
  Bottom 0.406: v57.78,23.62 59.18,23.62 v64.77,29.21
N$25
  Top 0.406: IC6.1 56.52,17.46 R31.1 57.47,15.05 57.91,14.61 71.75,14.61 73.66,16.51 R24.1
N$26  (via drill 0.6)
  Top 0.406: IC5.6 57.27,68.83 v56.52,68.07 | v56.52,71.88 56.52,73.25 C15.+
  Bottom 0.406: v56.52,68.07 v56.52,71.88
N$27
  Top 0.406: C15.- 59.92,71.15 IC5.3
N$28  (via drill 0.6)
  Top 0.406: IC6.2 57.78,22.23 59.05,23.5 IC6.6 v59.05,27.3 | R26.2 v57.47,34.04 R27.1
  Bottom 0.406: v57.47,34.04 58.17,34.04 59.05,33.15 v59.05,27.3
N$29  (1 unrouted)
  Top 0.406: A1.K 41.91,16.51 40.64,17.78
N$30
  Top 0.406: B1.K 42.23,29.21 R22.1
N$31  (via drill 0.6)
  Top 0.406: IC6.3 v59.05,18.16 59.05,16.82 R31.2 | R28.1 42.99,27.62 v46.99,23.62
  Bottom 0.406: v46.99,23.62 46.99,20.32 48.26,19.05 58.17,19.05 v59.05,18.16
N$32
  Top 0.406: IC6.5 60.33,28.25 R30.2 59.37,30.42 58.8,30.99 55.12,30.99 53.59,32.51 47.5,32.51 46.99,33.02 46.99,36.2 42.87,40.32 R29.1
N$33
  Top 0.406: R34.2 73.66,48.26 | 73.66,48.26 C20.1 | OUT7.4 73.66,48.26
N$34
  Top 0.406: R35.2 73.66,60.96 | 73.66,60.96 C21.1 | OUT8.4 73.66,60.96
N$35  (via drill 0.6)
  Top 0.406: R40.1 57.78,54.3 IC7.7 v57.78,49.02 | v69.22,53.97 71.44,53.97 R35.1
  Bottom 0.406: v57.78,49.02 59.18,49.02 64.14,53.97 v69.22,53.97
N$36
  Top 0.406: IC7.1 56.52,42.86 R41.1 57.47,40.45 57.91,40 70.17,40 R34.1
N$37  (via drill 0.6)
  Top 0.406: R36.2 v57.47,59.44 R37.1 | v59.05,52.7 IC7.6 59.05,48.89 57.78,47.62 IC7.2
  Bottom 0.406: v59.05,52.7 59.05,57.85 v57.47,59.44
N$38  (via drill 0.6)
  Top 0.406: IC3.6 19.17,68.83 v18.41,68.07 | v18.41,71.88 18.41,73.25 C11.+
  Bottom 0.406: v18.41,68.07 v18.41,71.88
N$39
  Top 0.406: C11.- 21.82,71.15 IC3.3
N$40
  Top 0.406: C19.K 42.23,41.91 R33.1
N$41
  Top 0.406: D7.K 42.23,54.61 R32.1
N$42  (via drill 0.6)
  Top 0.406: R38.1 42.87,53.02 v46.99,48.89 | IC7.3 v59.05,43.81 59.05,42.22 R41.2
  Bottom 0.406: v46.99,48.89 46.99,45.72 48.26,44.45 58.42,44.45 v59.05,43.81
N$43
  Top 0.406: IC7.5 60.33,53.97 59.69,54.61 R40.2 59.37,55.82 58.93,56.26 55.24,56.26 53.59,57.91 47.5,57.91 46.99,58.42 46.99,61.59 42.87,65.72 R39.1
N$44
  Top 0.813: U$4.BARREL 43.59,88.9 40.64,88.9 39.37,87.63 39.37,78.74 41.48,76.63 U$3.BARREL 51.21,83.82 D8.A
N$45
  Top 0.406: R42.1 57.15,81.28 55.88,82.55 53.34,82.55 52.07,81.28 PWR1.K
N$46
  Top 0.813: SW2.3 66.04,86.36 | 66.04,86.36 SW2.4 | D11.C 66.04,86.36
N$47
  Top 0.406: R45.2 111.76,22.86 | 111.76,22.86 C26.1 | OUT9.4 111.76,22.86
N$48
  Top 0.406: R46.2 111.76,35.56 | 111.76,35.56 C27.1 | OUT10.4 111.76,35.56
N$49  (via drill 0.6)
  Top 0.406: R51.1 95.89,28.89 IC10.7 v95.89,23.62 | R46.1 111.76,30.48 110.49,29.21 v102.87,29.21
  Bottom 0.406: v95.89,23.62 97.28,23.62 v102.87,29.21
N$50
  Top 0.406: IC10.1 94.61,17.46 R52.1 95.57,15.05 96.01,14.61 109.86,14.61 111.76,16.51 R45.1
N$51  (via drill 0.6)
  Top 0.406: IC9.6 95.37,68.83 v94.61,68.07 | v94.61,71.88 94.61,73.25 C28.+
  Bottom 0.406: v94.61,68.07 v94.61,71.88
N$52
  Top 0.406: C28.- 98.02,71.15 IC9.3
N$53  (via drill 0.6)
  Top 0.406: IC10.2 95.89,22.23 97.16,23.5 IC10.6 v97.16,27.3 | R47.2 v95.57,34.04 R48.1
  Bottom 0.406: v95.57,34.04 96.27,34.04 97.16,33.15 v97.16,27.3
N$54  (1 unrouted)
  Top 0.406: A2.K 80.01,16.51 78.74,17.78
N$55
  Top 0.406: B2.K 80.33,29.21 R43.1
N$56  (via drill 0.6)
  Top 0.406: IC10.3 v97.16,18.16 97.16,16.82 R52.2 | R49.1 81.09,27.62 v85.09,23.62
  Bottom 0.406: v85.09,23.62 85.09,20.32 86.36,19.05 96.27,19.05 v97.16,18.16
N$57
  Top 0.406: IC10.5 98.42,28.25 R51.2 97.47,30.42 96.9,30.99 93.22,30.99 91.69,32.51 85.6,32.51 85.09,33.02 85.09,36.2 80.97,40.32 R50.1
N$58
  Top 0.406: R55.2 111.76,48.26 | 111.76,48.26 C33.1 | OUT11.4 111.76,48.26
N$59
  Top 0.406: R56.2 111.76,60.96 | 111.76,60.96 C34.1 | OUT12.4 111.76,60.96
N$60  (via drill 0.6)
  Top 0.406: R61.1 95.89,54.3 IC11.7 v95.89,49.02 | v107.31,53.97 109.53,53.97 R56.1
  Bottom 0.406: v95.89,49.02 97.28,49.02 102.23,53.97 v107.31,53.97
N$61
  Top 0.406: IC11.1 94.61,42.86 R62.1 95.57,40.45 96.01,40 108.27,40 R55.1
N$62  (via drill 0.6)
  Top 0.406: R57.2 v95.57,59.44 R58.1 | v97.16,52.7 IC11.6 97.16,48.89 95.89,47.62 IC11.2
  Bottom 0.406: v97.16,52.7 97.16,57.85 v95.57,59.44
N$63
  Top 0.406: C32.K 80.33,41.91 R54.1
N$64
  Top 0.406: D13.K 80.33,54.61 R53.1
N$65  (via drill 0.6)
  Top 0.406: R59.1 80.97,53.02 v85.09,48.89 | IC11.3 v97.16,43.81 97.16,42.22 R62.2
  Bottom 0.406: v85.09,48.89 85.09,45.72 86.36,44.45 96.52,44.45 v97.16,43.81
N$66
  Top 0.406: IC11.5 98.42,53.97 97.79,54.61 R61.2 97.47,55.82 97.03,56.26 93.34,56.26 91.69,57.91 85.6,57.91 85.09,58.42 85.09,61.59 80.97,65.72 R60.1
N$67
  Top 0.813: U$6.BARREL 81.69,88.9 78.74,88.9 77.47,87.63 77.47,78.74 79.58,76.63 U$5.BARREL 89.31,83.82 D14.A
N$68
  Top 0.406: R63.1 95.25,81.28 93.98,82.55 91.44,82.55 90.17,81.28 PWR2.K
N$69
  Top 0.813: SW3.3 104.14,86.36 | 104.14,86.36 SW3.4 | D17.C 104.14,86.36
N$70
  Top 0.406: R66.2 149.86,22.86 | 149.86,22.86 C39.1 | OUT13.4 149.86,22.86
N$71
  Top 0.406: R67.2 149.86,35.56 | 149.86,35.56 C40.1 | OUT14.4 149.86,35.56
N$72  (via drill 0.6)
  Top 0.406: R72.1 133.99,28.89 IC14.7 v133.99,23.62 | R67.1 149.86,30.48 148.59,29.21 v140.97,29.21
  Bottom 0.406: v133.99,23.62 135.38,23.62 v140.97,29.21
N$73
  Top 0.406: IC14.1 132.72,17.46 R73.1 133.67,15.05 134.11,14.61 147.96,14.61 149.86,16.51 R66.1
N$74  (via drill 0.6)
  Top 0.406: IC13.6 133.47,68.83 v132.72,68.07 | v132.72,71.88 132.72,73.25 C41.+
  Bottom 0.406: v132.72,68.07 v132.72,71.88
N$75
  Top 0.406: C41.- 136.12,71.15 IC13.3
N$76  (via drill 0.6)
  Top 0.406: IC14.2 133.99,22.23 135.25,23.5 IC14.6 v135.25,27.3 | R68.2 v133.67,34.04 R69.1
  Bottom 0.406: v133.67,34.04 134.37,34.04 135.25,33.15 v135.25,27.3
N$77  (1 unrouted)
  Top 0.406: A3.K 118.11,16.51 116.84,17.78
N$78
  Top 0.406: B3.K 118.43,29.21 R64.1
N$79  (via drill 0.6)
  Top 0.406: IC14.3 v135.25,18.16 135.25,16.82 R73.2 | R70.1 119.19,27.62 v123.19,23.62
  Bottom 0.406: v123.19,23.62 123.19,20.32 124.46,19.05 134.37,19.05 v135.25,18.16
N$80
  Top 0.406: IC14.5 136.53,28.25 R72.2 135.57,30.42 135,30.99 131.32,30.99 129.79,32.51 123.7,32.51 123.19,33.02 123.19,36.2 119.06,40.32 R71.1
N$81
  Top 0.406: R76.2 149.86,48.26 | 149.86,48.26 C46.1 | OUT15.4 149.86,48.26
N$82
  Top 0.406: R77.2 149.86,60.96 | 149.86,60.96 C47.1 | OUT16.4 149.86,60.96
N$83  (via drill 0.6)
  Top 0.406: R82.1 133.99,54.3 IC15.7 v133.99,49.02 | v145.41,53.97 147.63,53.97 R77.1
  Bottom 0.406: v133.99,49.02 135.38,49.02 140.34,53.97 v145.41,53.97
N$84
  Top 0.406: IC15.1 132.72,42.86 R83.1 133.67,40.45 134.11,40 146.37,40 R76.1
N$85  (via drill 0.6)
  Top 0.406: R78.2 v133.67,59.44 R79.1 | v135.25,52.7 IC15.6 135.25,48.89 133.99,47.62 IC15.2
  Bottom 0.406: v135.25,52.7 135.25,57.85 v133.67,59.44
N$86
  Top 0.406: C45.K 118.43,41.91 R75.1
N$87
  Top 0.406: D19.K 118.43,54.61 R74.1
N$88  (via drill 0.6)
  Top 0.406: R80.1 119.06,53.02 v123.19,48.89 | IC15.3 v135.25,43.81 135.25,42.22 R83.2
  Bottom 0.406: v123.19,48.89 123.19,45.72 124.46,44.45 134.62,44.45 v135.25,43.81
N$89
  Top 0.406: IC15.5 136.53,53.97 135.89,54.61 R82.2 135.57,55.82 135.13,56.26 131.44,56.26 129.79,57.91 123.7,57.91 123.19,58.42 123.19,61.59 119.06,65.72 R81.1
N$90
  Top 0.813: U$8.BARREL 119.79,88.9 116.84,88.9 115.57,87.63 115.57,78.74 117.68,76.63 U$7.BARREL 127.41,83.82 D20.A
N$91
  Top 0.406: R84.1 133.35,81.28 132.08,82.55 129.54,82.55 128.27,81.28 PWR3.K
N$92
  Top 0.813: SW4.3 142.24,86.36 | 142.24,86.36 SW4.4 | D23.C 142.24,86.36
VGATE1  (via drill 0.6)
  Top 0.406: C1.1 16.51,24.13 17.84,25.46 IC1.8 v18.41,22.23 | SW1.1 31.37,89.28 25.14,89.28 D4.C
  Bottom 0.406: v18.41,22.23 20.95,22.23 26.67,27.94 33.02,27.94 35.56,30.48 35.56,54.61 36.83,55.88 36.83,83.82 SW1.1
VGATE2  (via drill 0.6)
  Top 0.406: C2.1 18.26,50.86 IC2.8 v18.41,47.62 | SW1.2 34.29,87.63 31.75,90.17 26.92,90.17 25.65,91.44 D5.C
  Bottom 0.406: v18.41,47.62 20.7,47.62 26.04,52.96 32.26,52.96 35.56,56.26 35.56,81.28 33.02,83.82 33.02,86.36 34.29,87.63 SW1.2
VGATE3  (via drill 0.6)
  Top 0.406: C22.1 56.36,50.86 IC7.8 v56.52,47.62 | SW2.2 72.39,87.63 69.85,90.17 65.02,90.17 63.75,91.44 D10.C
  Bottom 0.406: v56.52,47.62 58.8,47.62 64.14,52.96 70.36,52.96 73.66,56.26 73.66,81.28 71.12,83.82 71.12,86.36 72.39,87.63 SW2.2
VGATE4  (via drill 0.6)
  Top 0.406: C18.1 54.61,24.13 55.94,25.46 IC6.8 v56.52,22.23 | SW2.1 69.47,89.28 63.24,89.28 D9.C
  Bottom 0.406: v56.52,22.23 59.05,22.23 64.77,27.94 71.12,27.94 73.66,30.48 73.66,54.61 74.93,55.88 74.93,83.82 SW2.1
VGATE5  (via drill 0.6)
  Top 0.406: C35.1 94.46,50.86 IC11.8 v94.61,47.62 | SW3.2 110.49,87.63 107.95,90.17 103.12,90.17 101.85,91.44 D16.C
  Bottom 0.406: v94.61,47.62 96.9,47.62 102.23,52.96 108.46,52.96 111.76,56.26 111.76,81.28 109.22,83.82 109.22,86.36 110.49,87.63 SW3.2
VGATE6  (via drill 0.6)
  Top 0.406: C31.1 92.71,24.13 94.04,25.46 IC10.8 v94.61,22.23 | SW3.1 107.57,89.28 101.34,89.28 D15.C
  Bottom 0.406: v94.61,22.23 97.16,22.23 102.87,27.94 109.22,27.94 111.76,30.48 111.76,54.61 113.03,55.88 113.03,83.82 SW3.1
VGATE7  (via drill 0.6)
  Top 0.406: C48.1 132.56,50.86 IC15.8 v132.72,47.62 | SW4.2 148.59,87.63 146.05,90.17 141.22,90.17 139.95,91.44 D22.C
  Bottom 0.406: v132.72,47.62 135,47.62 140.34,52.96 146.56,52.96 149.86,56.26 149.86,81.28 147.32,83.82 147.32,86.36 148.59,87.63 SW4.2
VGATE8  (via drill 0.6)
  Top 0.406: C44.1 130.81,24.13 132.14,25.46 IC14.8 v132.72,22.23 | SW4.1 145.67,89.28 139.44,89.28 D21.C
  Bottom 0.406: v132.72,22.23 135.25,22.23 140.97,27.94 147.32,27.94 149.86,30.48 149.86,54.61 151.13,55.88 151.13,83.82 SW4.1
VIN  (via drill 0.6)
  Top 0.813: C7.1 30.99,68.67 v30.99,71.12 28.83,71.12 IC4.3 | C12.+ 24.38,83.44 | 24.38,83.44 D2.C | 24.38,83.44 23.74,83.44 23.11,84.07 23.11,85.85 22.61,86.36 D3.A
  Bottom 0.813: C12.+ 24.38,77.72 v30.99,71.12
VIN1  (via drill 0.6)
  Top 0.813: C24.1 69.09,68.67 v69.09,71.12 66.93,71.12 IC8.3 | C23.+ 62.48,83.44 | 62.48,83.44 D8.C | 62.48,83.44 61.84,83.44 61.21,84.07 61.21,85.85 60.71,86.36 D11.A
  Bottom 0.813: C23.+ 62.48,77.72 v69.09,71.12
VIN2  (via drill 0.6)
  Top 0.813: C37.1 107.19,68.67 v107.19,71.12 105.03,71.12 IC12.3 | C36.+ 100.58,83.44 | 100.58,83.44 D14.C | 100.58,83.44 99.94,83.44 99.31,84.07 99.31,85.85 98.81,86.36 D17.A
  Bottom 0.813: C36.+ 100.58,77.72 v107.19,71.12
VIN3  (via drill 0.6)
  Top 0.813: C50.1 145.29,68.67 v145.29,71.12 143.13,71.12 IC16.3 | C49.+ 138.68,83.44 | 138.68,83.44 D20.C | 138.68,83.44 138.04,83.44 137.41,84.07 137.41,85.85 136.91,86.36 D23.A
  Bottom 0.813: C49.+ 138.68,77.72 v145.29,71.12

## Text on the board
tDocu: six4pix.com/cvocd | six4pix.com/cvocd | six4pix.com/cvocd | six4pix.com/cvocd | CV.OCD Gate Boost v2 | CV.OCD Gate Boost v2 | CV.OCD Gate Boost v2 | CV.OCD Gate Boost v2
_tPlace: OUT4 | OUT4 | OUT4 | OUT4 | IN4 | IN4 | IN4 | IN4 | OUT3 | OUT3 | OUT3 | OUT3 | IN3 | IN3 | IN3 | IN3 | OUT2 | OUT2 | OUT2 | OUT2 | IN2 | IN2 | IN2 | IN2 | OUT1 | OUT1 | OUT1 | OUT1 | IN1 | IN1 | IN1 | IN1
_tNames: D5 | D5 | D5 | D5 | D4 | D4 | D4 | D4 | D3 | D3 | D3 | D3 | PWR | PWR | PWR | PWR | D2 | D2 | D2 | D2 | R17 | R17 | R17 | R17 | SW1 | SW1 | SW1 | SW1 | C12 | C8 | C12 | C8 | C12 | C8 | C12 | C8 | C11 | C11 | C11 | C11 | IC3 | IC3 | IC3 | IC3 | D1 | D1 | D1 | D1 | IC4 | IC4 | IC4 | IC4 | C10 | C10 | C10 | C10 | C7 | C7 | C7 | C7 | C9 | C9 | C9 | C9 | R16 | C6 | R16 | C6 | R16 | C6 | R16 | C6 | R8 | R7 | R8 | R7 | R8 | R7 | R8 | R7 | R15 | R15 | R15 | R15 | R21 | R21 | R21 | R21 | R14 | R14 | R14 | R14 | D | D | D | D | C5 | C5 | C5 | C5 | R6 | R5 | R6 | R5 | R6 | R5 | R6 | R5 | C2 | C2 | C2 | C2 | R20 | R20 | R20 | R20 | IC2 | IC2 | IC2 | IC2 | C | R13 | C | R13 | C | R13 | C | R13 | R12 | C4 | R12 | C4 | R12 | C4 | R12 | C4 | R4 | R4 | R4 | R4 | R3 | R3 | R3 | R3 | R19 | R19 | R19 | R19 | R11 | R11 | R11 | R11 | R10 | R10 | R10 | R10 | B | B | B | B | C3 | C3 | C3 | C3 | R2 | R2 | R2 | R2 | R1 | R1 | R1 | R1 | C1 | C1 | C1 | C1 | R18 | R18 | R18 | R18 | IC1 | IC1 | IC1 | IC1 | A | R9 | A | R9 | A | R9 | A | R9